# Altium PCB ESP8266.PcbDoc
Units mil, origin at the board's own origin, x right, y up, seen from the top; angles counter-clockwise.
Board outline 1305 x 1305 mil, 2 copper layers (Top Layer, Bottom Layer); 13 components, 24 nets, 72 pads, 40 vias.
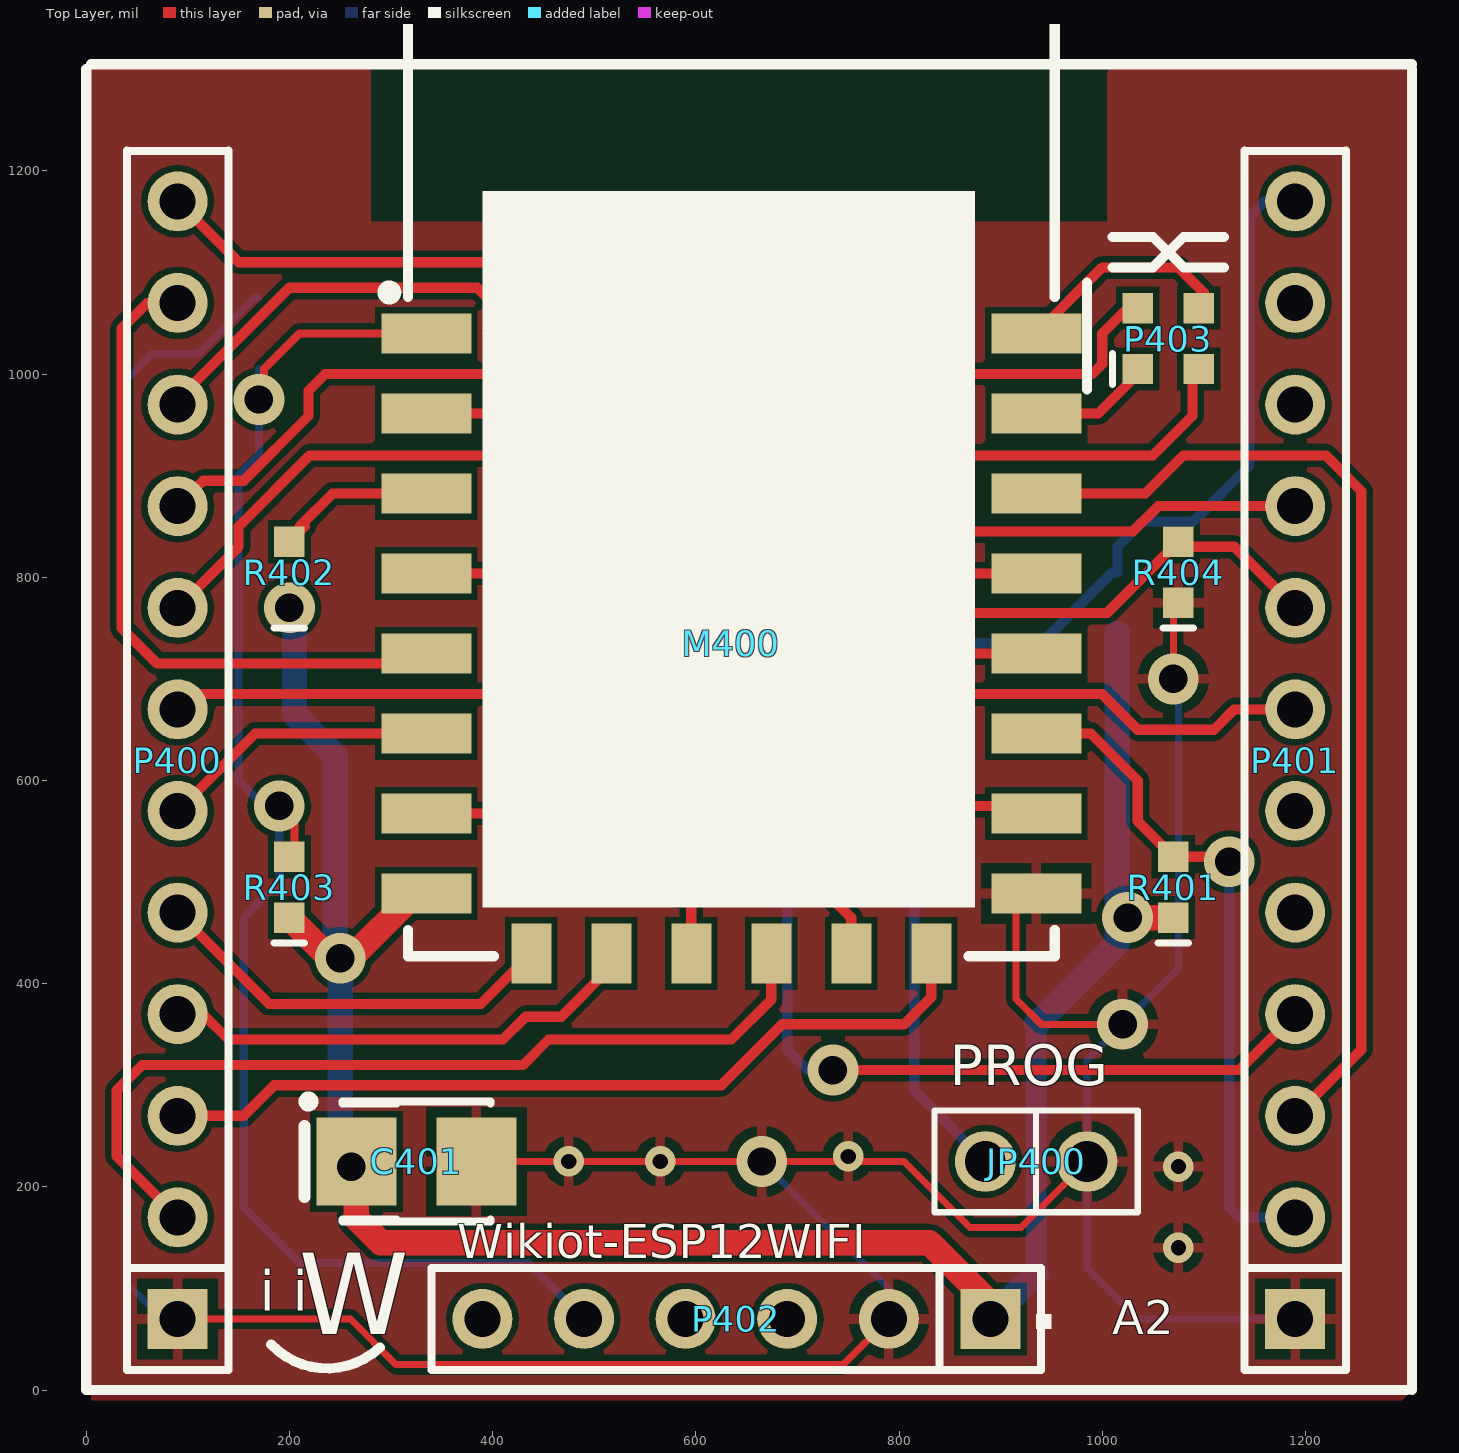
[diagram p0: Top Layer view]
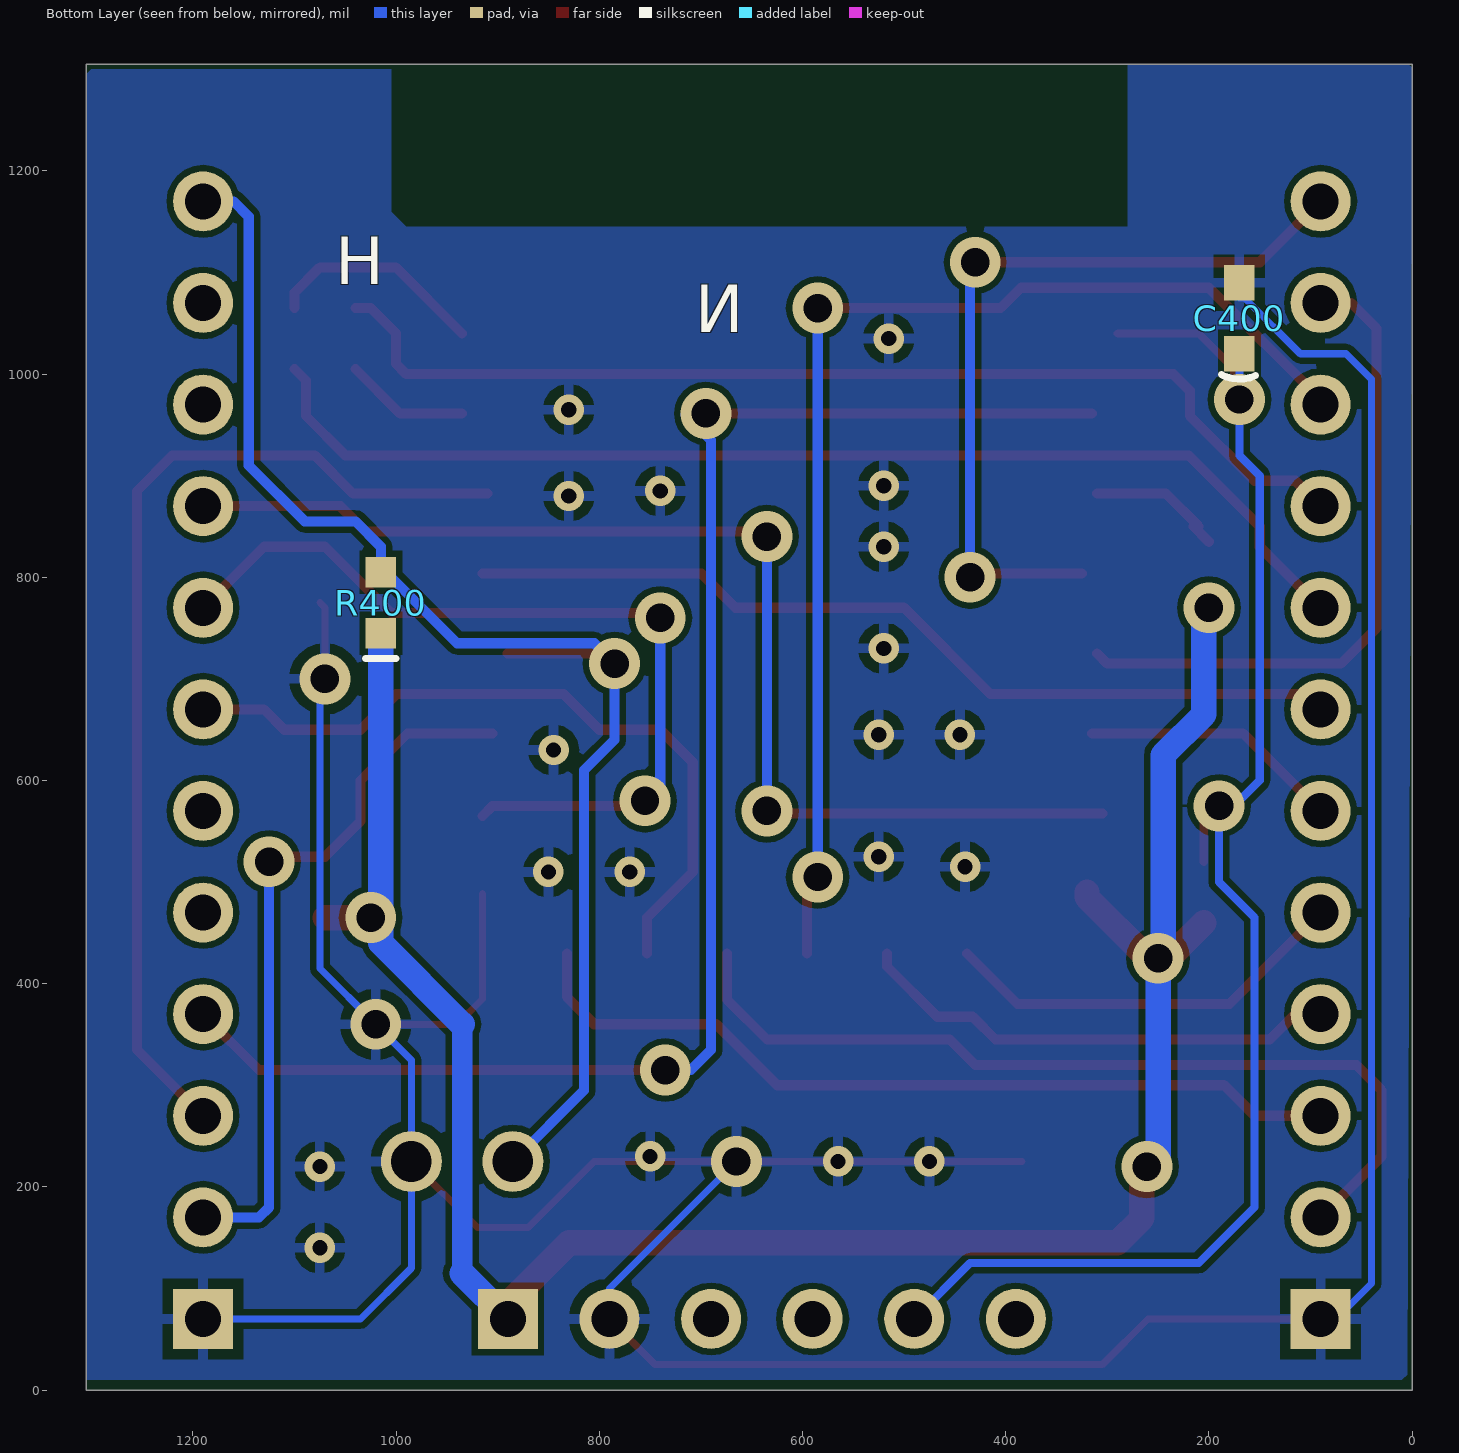
[diagram p1: Bottom Layer view, seen from below]

## Layer stack, top to bottom
Top Solder: solder mask 0.4, Solder Resist, Dk 3.5
Top Layer: signal copper 1.4
Dielectric1: dielectric 12.6, FR-4, Dk 4.8
Bottom Layer: signal copper 1.4
Bottom Solder: solder mask 0.4, Solder Resist, Dk 3.5

## Board outline
0,1305 0,0 1305,0 1305,1305

## Design rules (kind name [scope] priority, off if disabled: settings)
Clearance [All] p1: gap=6
PolygonConnect [All] p1: connectstyle=Relief reliefconductorwidth=10 reliefentries=4 polygonreliefangle="90 Angle" airgapwidth=10
RoomDefinition ESP8266 [InComponentClass('ESP8266')] p1: confinementstyle=ConfineIn formatcopy=TRUE lockcomponents=FALSE outline 0,0 1305,0 1305,1405 0,1405
RoutingVias [All] p1: holewidth=12 width=25 viastyle="Through Hole" minholewidth=12 minwidth=25 maxholewidth=28 maxwidth=50
SolderMaskExpansion [All] p1: expansion=4
Width [All] p1: maxlimit=55 minlimit=7 preferedwidth=10
30 further rules are at their usual default settings.

## Components (designator, comment, footprint, x,y, rotation, side; value= is the part's Value field where it differs from the comment)
C400 "100nF" C0603L 170,1055 r90 bottom
C401 "100uF TAJB107M006RNJ" SMT_C_Tantalum_B 325,225 r0 top
JP400 "UART Download" SIP2 985,225 r180 top
M400 "ESP_12E" ESP_12E 320,1040 r0 top
P400 "Synio Header-L 12-Pin" HDR1X12/2.54MM 90,70 r90 top
P401 "Synio Header-R 12-Pin" HDR1X12/2.54MM 1190,70 r90 top
P402 "Synio Power Header 6 Pin" HDR1X6/2.54MM 890,70 r180 top
P403 "Header 2X2" JUMPER4_SMD 1035,1035 r90 top
R400 "12k" R0603 1015,775 r90 bottom
R401 "12k" R0603 1070,495 r90 top
R402 "12k" R0603 200,805 r90 top
R403 "12k" R0603 200,495 r90 top
R404 "12k" R0603 1075,805 r90 top

## Footprints (in the part's own frame and the unit in brackets; to place one, negate y for a bottom-side part, rotate by r counter-clockwise, add the part's x,y. Pads: shape width x height; smd on the part's side, far side on the other; paste and mask are expansions set on the pad)
C0603L [mil]
  rect 35x30 smd: 1(-35,0) 2(35,0)
  silkscreen extent -60,-16 -56,18, body extent -31,-16 32,15, height 24
ESP_12E [mm] "ESP-12 Wi-Fi Module by AI-Thinker"
  rect 2.25x1 smd: 1(0.375,0) 2(0.375,-2) 3(0.375,-4) 4(0.375,-6) 5(0.375,-8) 6(0.375,-10) 7(0.375,-12) 8(0.375,-14) 15(15.625,-14) 16(15.625,-12) 17(15.625,-10) 18(15.625,-8) 19(15.625,-6) 20(15.625,-4) 21(15.625,-2) 22(15.625,0)
  rect 1x1.5 smd: 9(3,-15.5) 10(5,-15.5) 11(7,-15.5) 12(9,-15.5) 13(11,-15.5) 14(13,-15.5)
  silkscreen extent -0.7,-15.57 16.08,8.37, body extent 0,-15.49 16,8.51, height 2.75
HDR1X6/2.54MM [mm] "Connector; Header; 6 Position"
  rect 1.5x1.5 hole 0.9: 1(0,0)
  round 1.5 hole 0.9: 2(2.54,0) 3(5.08,0) 4(7.62,0) 5(10.16,0) 6(12.7,0)
  silkscreen extent -1.52,-1.27 13.97,1.27, body extent -1.32,-1.5 13.92,1.42, height 8.51
HDR1X12/2.54MM [mm] "Connector; Header; 12 Position"
  rect 1.5x1.5 hole 0.9: 1(0,0)
  round 1.5 hole 0.9: 2(2.54,0) 3(5.08,0) 4(7.62,0) 5(10.16,0) 6(12.7,0) 7(15.24,0) 8(17.78,0) 9(20.32,0) 10(22.86,0) 11(25.4,0) 12(27.94,0)
  silkscreen extent -1.27,-1.27 29.21,1.27, body extent -1.29,-1.48 29.19,1.44, height 8.51
JUMPER4_SMD [mil]
  rect 30x30 smd: 1(-30,0) 2(30,0) 3(-30,-60) 4(30,-60)
  silkscreen extent -45,25 -15,25
R0603 [mil]
  rect 30x30 smd: 1(-30,0) 2(30,0)
  silkscreen extent -55,-15 -55,15, body extent -31,-16 32,15, height 18
SIP2 [mil]
  round 60 hole 40: 1(0,0) 2(100,0)
  silkscreen extent -50,-50 150,50
SMT_C_Tantalum_B [mm] "Capacitor, SM Tantalum; Body 3.5 x 2.8 mm (LxW typ)"
  rect 2x2.2 smd: 1(-1.5,0) 2(1.5,0)
  silkscreen extent -2.82,-1.5 1.85,1.62, body extent -1.75,-1.4 1.75,1.4, height 1.9

## Part data
C400: library part SMT_C_0402, "Surface mount capacitor 0402"
C401: library part SMT_C_Tantalum_B, "Capacitor, SM Tantalum; Body 3.5 x 2.8 mm (LxW typ)"
JP400: library part Jumper2-2, "Jumper2"
M400: "ESP-12 Wi-Fi Module by AI-Thinker"
P400: "Synio Header-L, 12-Pin"
P401: "Synio Header-R, 12-Pin"
P403: "Header, 2-Pin, Dual row"
R400 R401 R402 R403 R404: library part SMT_R_0402, "Surface mount resistor 0402"

## Via types
v1: diameter 50, hole 28, Top Layer to Bottom Layer, 21 vias
v2: diameter 30, hole 15, Top Layer to Bottom Layer, 19 vias

## Nets (pads, with @x,y where several pads share a name; then routed paths per layer and width w, separated by ;. In a path a pad name is that pad's centre, name@x,y a point inside that pad or via, vN(x,y) a via of type N, cw(c..) or ccw(c..) an arc to the next point about the centre after c; other vN are vias at no path point)
ADC: M400.2 P401.4 | length 1566.9
  Top Layer w10: M400.2@315,961.26 v1(695,961.26) ; v1(735,315) 810,315 1135,315 P401.4
  Bottom Layer w10: v1(695,961.26) 713.74,961.26 715,960 690,935 690,335 710,315 v1(735,315)
D3V3: C401.1 M400.8 P402.1 R400.1 R401.1 R402.1 R403.1 | length 2231.7
  Top Layer w25: R403.1@205,460 240,425 v1(250,425) 260,425 320,485 M400.8@320,490 ; v1(260.94,220) C401.1 265.94,169.06 290,145 830,145 890,85 P402.1 ; v1(1025,465) R401.1
  Bottom Layer w20: 935,115 935,360
  Bottom Layer w25: v1@205,760 205,665 245,625 245,430 v1(250,425) 250,230 260,220 v1(260.94,220) ; P402.1 935,115 ; 935,360 1015,440 R400.1
  other v1: 200,770
EN: M400.3 R402.2 | length 139.7
  Top Layer w10: R402.2 215.11,850.11 210.11,850.11 242.52,882.52 M400.3@310,882.52
GND: C400.2 C401.2 JP400.1 M400.15 P400.1 P401.1 P402.2 R404.1 | length 3902.8
  Top Layer w7: P400.1 260,70 305,25 745,25 P402.2 P402.2@790,95 ; C401.2 v1(665,225) 805,225 870,160 920,160 JP400.1 ; M400.15@915,488.82 915,385 940,360 v1(1020,360) ; v1(1070,700) 1070,770 R404.1
  Bottom Layer w7: P400.1 75,70 40,105 40,995 65,1020 110,1020 165,1075 C400.2@170,1075 ; v1(665,225) 790,100 P402.2 ; v1(1070,700) 1070,710 1075,705 1075,415 v1(1020,360) 985,325 JP400.1 985,120 1035,70 P401.1
  other v2: 1075,140 1075,220 475,225 565,225 750,230 770,510 850,510 440,515 525,525 845,630 445,645 525,645 520,730 520,830 830,880 740,885 520,890 830,965 515,1035
GPIO0: JP400.2 M400.18 P401.12 R400.2 | length 1392.4
  Top Layer w10: v1(785,715) 795.04,725.04 890.16,725.04
  Bottom Layer w10: JP400.2 815,295 815,610 785,640 v1(785,715) 805,735 940,735 1010,805 R400.2 1015,830 1040,855 1090,855 1145,910 1145,1155 1160,1170 P401.12
GPIO2: M400.17 P401.2 R401.2 | length 702.8
  Top Layer w10: M400.17@905,646.3 988.7,646.3 1035,600 1035,560 R401.2 v1@1125,525
  Bottom Layer w10: v1(1125,520) 1125,180 1135,170 P401.2
GPIO4: M400.19 P400.7 | length 869.8
  Top Layer w10: P400.7@97.5,677.5 105,685 415,685 500,770 665.91,770 699.69,803.78 890.16,803.78 M400.19@915,803.78
GPIO5: M400.20 P401.3 | length 1016.9
  Top Layer w10: M400.20@910,882.52 1042.52,882.52 1080,920 1220,920 1255,885 1255,335 P401.3
GPIO9: M400.11 P400.10 | length 1193.5
  Top Layer w10: P400.10 90,975 200,1085 385,1085 405,1065 v1(585,1065) ; v1(585,505) 595.59,494.41 M400.11
  Bottom Layer w10: v1(585,505) v1(585,1065)
GPIO10: M400.12 P400.2 | length 876.6
  Top Layer w10: P400.2 30,230 30,295 55,320 430,320 455,345 635,345 674.33,384.33 M400.12
GPIO12: M400.6 P400.6 | length 258.4
  Top Layer w10: P400.6@91.3,571.3 P400.6 166.3,646.3 289.76,646.3 M400.6@315,646.3
GPIO13: M400.7 P401.9 | length 1169.9
  Top Layer w10: M400.7@305,567.56 635,567.56 v1(635,570) ; v1(635,840) 640,845 1030,845 1055,870 P401.9
  Bottom Layer w10: v1(635,570) v1(635,840)
GPIO14: M400.5 P400.11 | length 654
  Top Layer w10: P400.11 60,1070 35,1045 35,750 70,715 299.96,715 M400.5@310,725.04
GPIO15: M400.16 P401.8 R404.2 | length 849.2
  Top Layer w10: v1(740,760) 745,765 1005,765 1070,830 1130,830 P401.8 ; v1@760,575 905,575 M400.16@915,565
  Bottom Layer w10: v1(740,760) 740,595 v1(755,580)
GPIO16: M400.4 P400.12 | length 809.7
  Top Layer w10: P400.12 150,1110 415,1110 430,1095 v1(430,1110) ; M400.4@325,803.78 431.22,803.78 v1(435,800)
  Bottom Layer w10: v1(430,1110) 435,1105 v1(435,800)
NRST: C400.1 M400.1 P402.5 R403.2 | length 1480.4
  Top Layer w8: v1@175,960 175,1005 210,1040 289.76,1040 ; v1(190,575) 205,560 R403.2@205,520
  Bottom Layer w8: C400.1@170,1005 170,920 150,900 150,600 190,560 190,500 155,465 155,180 210,125 435,125 P402.5
  other v1: 170,975
RX0: P400.9 P403.2 | length 1063
  Top Layer w10: P400.9 115,895 155,895 218.75,958.75 218.75,983.75 235,1000 990,1000 1000,1010 1000,1040 1025,1065 P403.2@1040,1065
RXD0: M400.21 P403.1 | length 123
  Top Layer w10: M400.21 996.26,961.26 P403.1@1040,1005
SPI_CLK: M400.14 P400.3 | length 833.1
  Top Layer w10: P400.3 155,270 185,300 625,300 685,360 805,360 831.81,386.81 M400.14
SPI_INT: M400.13 P401.7 | length 739.4
  Top Layer w10: M400.13 753.07,465 708.07,510 708.07,618.07 740,650 800,650 835,685 1000,685 1035,650 1110,650 1130,670 P401.7
SPI_MISO: M400.10 P400.4 | length 479.9
  Top Layer w10: P400.4 115,370 140,345 410,345 432.5,367.5 467.5,367.5 516.85,416.85 M400.10
SPI_MOSI: M400.9 P400.5 | length 406
  Top Layer w10: P400.5 180,380 388.35,380 M400.9
TX0: P400.8 P403.3 | length 1139.6
  Top Layer w10: P400.8 150,830 150,850 220,920 1050,920 1088.74,958.74 1088.74,993.74 P403.3@1100,1005
TXD0: M400.22 P403.4 | length 217.1
  Top Layer w10: M400.22 1000.16,1105 1075,1105 1100,1080 P403.4@1100,1065
pads on no net: P401.5 P401.6 P401.10 P401.11 P402.3 P402.4 P402.6

## Polygon pours and split planes (outlines as drawn)
GND on Bottom Layer "Top Layer-No Net" (solid, remove dead copper, pour order 4): 0,1305 280,1305 280,1145 990,1145 1005,1160 1005,1300 1300,1300 1305,1295 1305,10 10,10 5,15
GND on Top Layer "Top Layer-No Net" (solid, remove dead copper, pour order 2): 0,1305 280,1305 280,1150 1005,1150 1005,1295 1000,1300 1300,1300 1300,5 1305,0 1295,-10 5,-10

## Keep-outs
Keep-Out Layer:
  lines w10: -1310,2605 2615,2605

## Silkscreen, mask and mechanical layers (free items; w line width, h text height)
Top Overlay:
  rectangle: 390,475 875,1180
  lines w10: 0,1300 0,0 1300,0 ; 5,1305 1305,1305 ; 182,45 ccw(c237,97) 289,42 ; 985,985 985,1090 ; 1010,1105 1050,1105 1080,1135 1120,1135 ; 1010,1135 1050,1135 1080,1105 1120,1105 ; 1305,0 1305,1300
  text "PROG" at 850,300 h40
  text "Wikiot-ESP12WIFI" at 365,130 h33.46
  text "i i" at 171,78 h40
  text "W" at 209,55 h80
  text "A2" at 1010,55 h33.46
Bottom Overlay:
  text "H" at 1060,1073 h80
  text "N" at 658,1026 h80

## Text inside footprints (layer, text, board x,y; h text height)
M400: Mechanical 13 "ANTENNA AREA" at 325,1350 h10; Mechanical 13 "CUTOUT POLYGON" at 325,1330 h10